# Altium PCB MezPCB.PcbDoc
Units mm, origin at the board's own origin, x right, y up, seen from the top; angles counter-clockwise.
Board outline 35 x 31.25 mm, 2 copper layers (Top Layer, Bottom Layer); 5 components, 18 nets, 80 pads, 0 vias.
Unrouted connection lines stored in the file: 5.
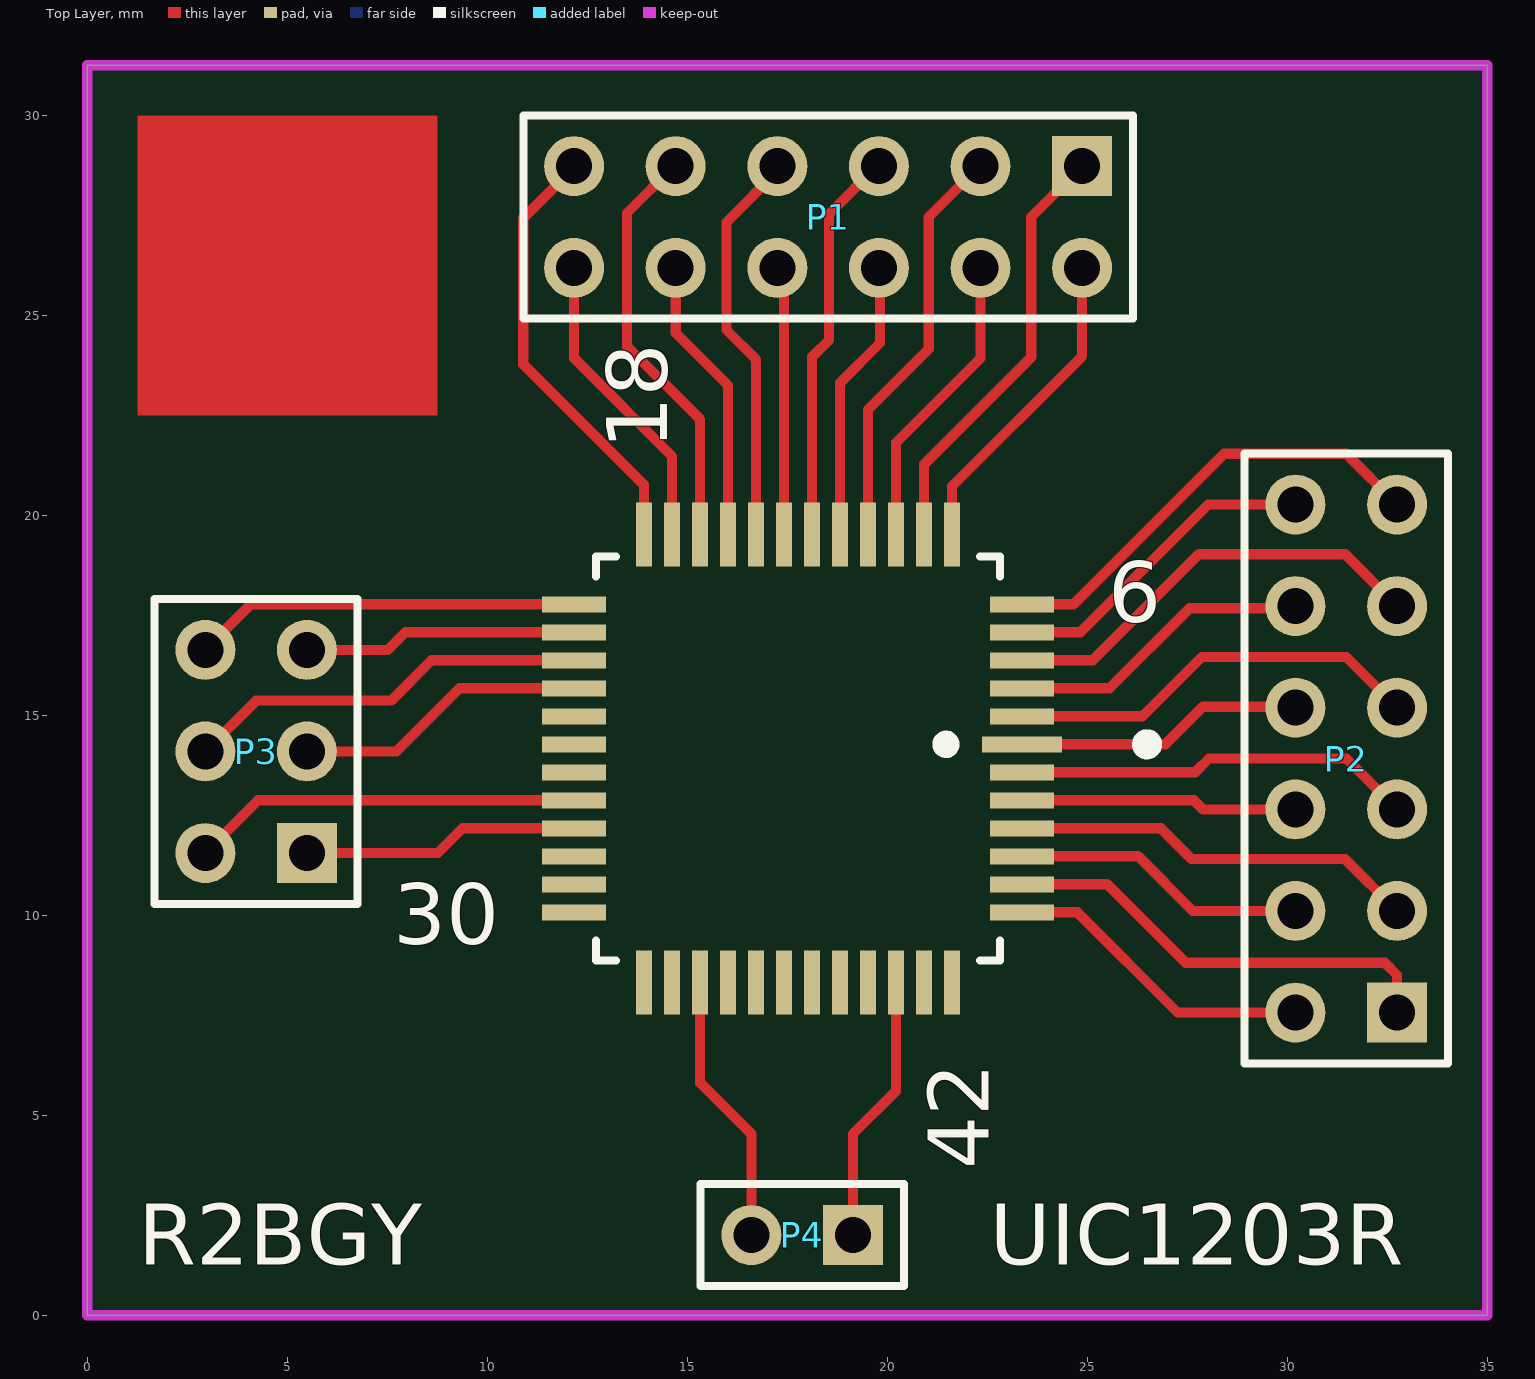
[diagram p0: Top Layer view]
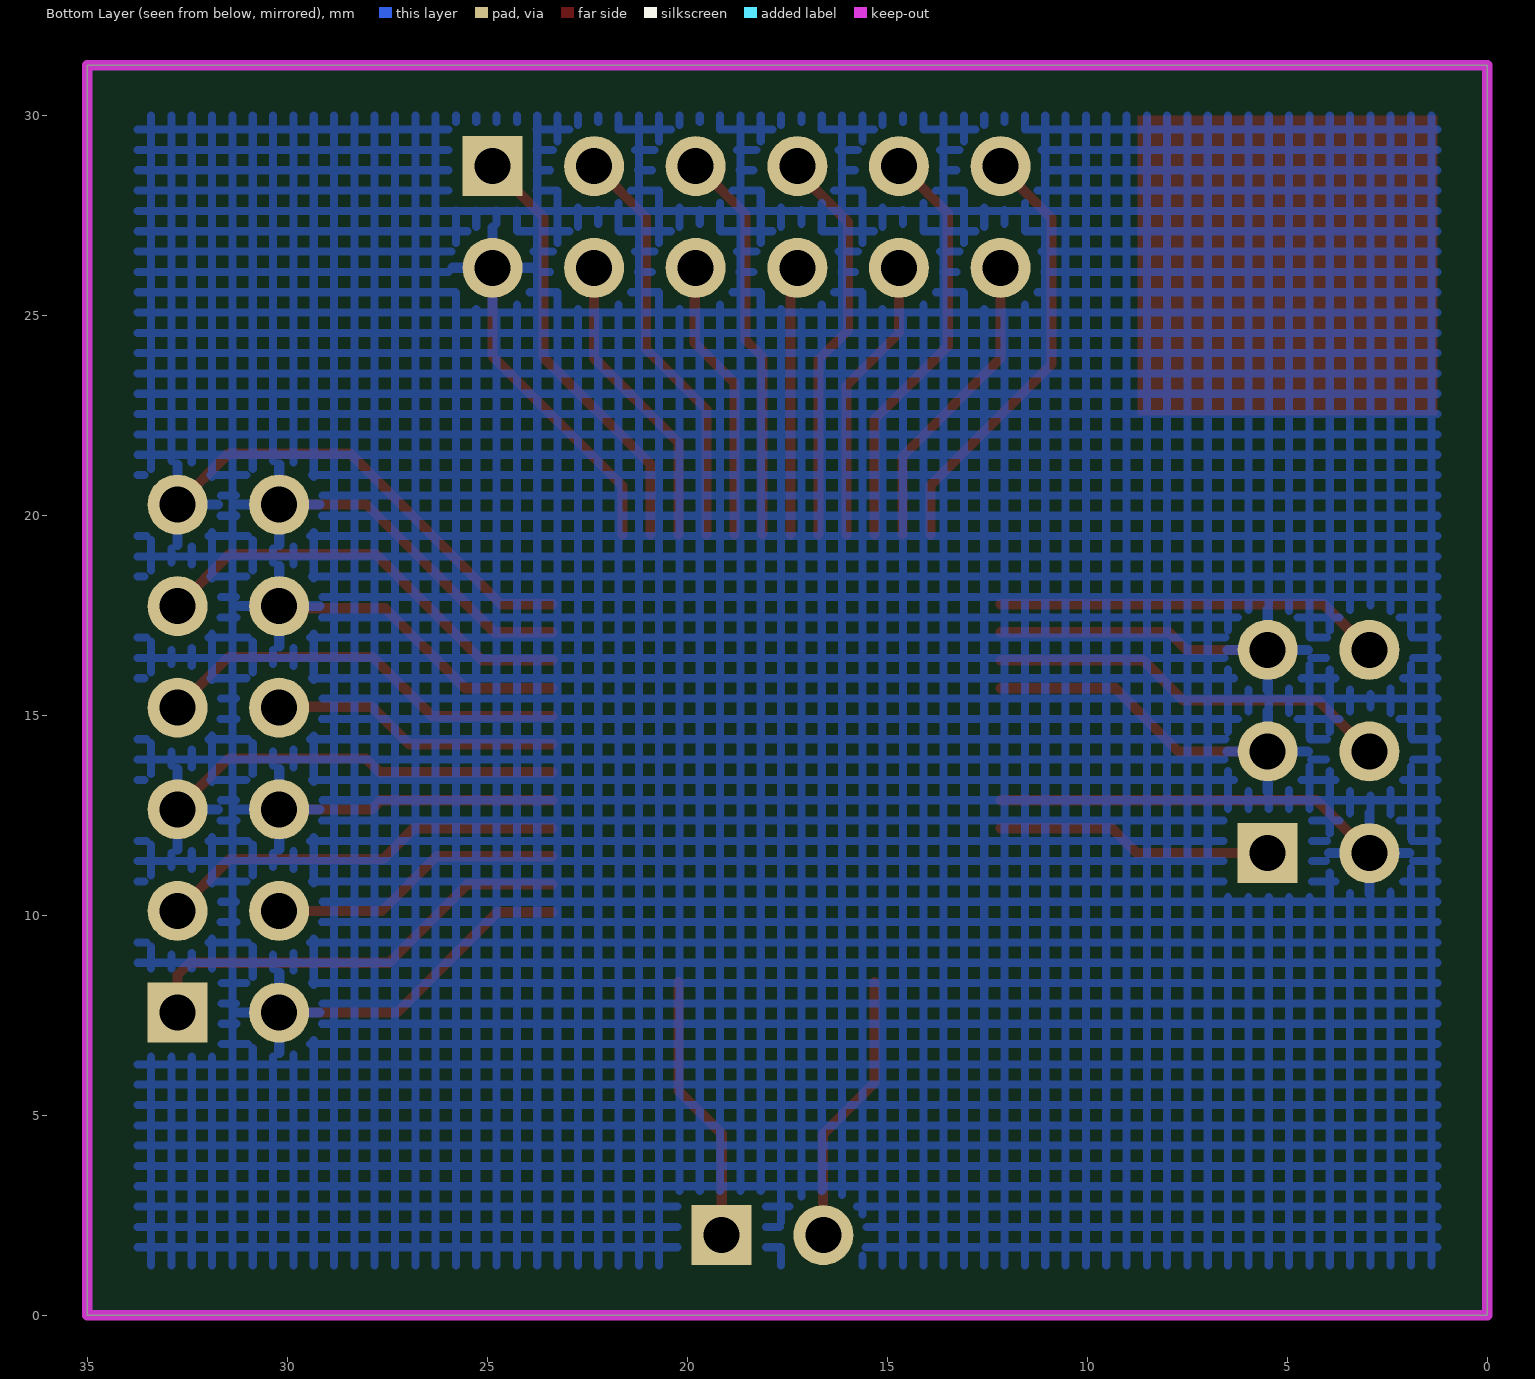
[diagram p1: Bottom Layer view, seen from below]

## Layer stack, top to bottom
Top Solder: solder mask 0.0102, Solder Resist, Dk 3.5
Top Layer: signal copper 0.0356
Dielectric 1: dielectric 0.32, FR-4, Dk 4.8
Bottom Layer: signal copper 0.0356
Bottom Solder: solder mask 0.0102, Solder Resist, Dk 3.5

## Board outline
0,0 35,0 35,31.25 0,31.25

## Design rules (kind name [scope] priority, off if disabled: settings)
Clearance [All] p1: gap=0.254
PolygonConnect [All] p1: connectstyle=Relief reliefconductorwidth=0.254 reliefentries=4 polygonreliefangle="90 Angle" airgapwidth=0.254
RoutingVias [All] p1: holewidth=0.711 width=1.27 viastyle="Through Hole" minholewidth=0.711 minwidth=1.27 maxholewidth=0.711 maxwidth=1.27
SolderMaskExpansion [All] p1: expansion=0.102
Width [All] p1: maxlimit=0.254 minlimit=0.254 preferedwidth=0.254
29 further rules are at their usual default settings.

## Components (designator, comment, footprint, x,y, rotation, side; value= is the part's Value field where it differs from the comment)
P1 "Header 6X2" HDR2X6 24.87,28.728 r180 top
P2 "Header 6X2" HDR2X6 32.744,7.569 r90 top
P3 "Header 3X2" HDR2X3 5.489,11.557 r90 top
P4 "Header 2" HDR1X2 19.141,2.007 r180 top
UIC1203R "UIC1203R" UIC1203R 23.371,14.275 r0 top (schematic designator D1)

## Footprints (in the part's own frame and the unit in brackets; to place one, negate y for a bottom-side part, rotate by r counter-clockwise, add the part's x,y. Pads: shape width x height; smd on the part's side, far side on the other; paste and mask are expansions set on the pad)
HDR1X2 [mm] "Connector; Header; 2 Position"
  rect 1.5x1.5 hole 0.9: 1(0,0)
  round 1.5 hole 0.9: 2(2.54,0)
  silkscreen extent -1.27,-1.27 3.81,1.27
HDR2X3 [mm] "Connector; Header; 3x2 Position"
  rect 1.5x1.5 hole 0.9: 1(0,0)
  round 1.5 hole 0.9: 2(0,2.54) 3(2.54,0) 4(2.54,2.54) 5(5.08,0) 6(5.08,2.54)
  silkscreen extent -1.27,-1.27 6.35,3.81
HDR2X6 [mm] "Connector; Header; 6x2 Position"
  rect 1.5x1.5 hole 0.9: 1(0,0)
  round 1.5 hole 0.9: 2(0,2.54) 3(2.54,0) 4(2.54,2.54) 5(5.08,0) 6(5.08,2.54) 7(7.62,0) 8(7.62,2.54) 9(10.16,0) 10(10.16,2.54) 11(12.7,0) 12(12.7,2.54)
  silkscreen extent -1.27,-1.27 13.97,3.81
UIC1203R [mm]
  rect 2x0.4 smd: 1(0,0)
  rect 1.6x0.4 smd: 2(0,0.7) 3(0,1.4) 4(0,2.1) 5(0,2.8) 6(0,3.5) 19(-11.2,3.5) 20(-11.2,2.8) 21(-11.2,2.1) 22(-11.2,1.4) 23(-11.2,0.7) 24(-11.2,0) 25(-11.2,-0.7) 26(-11.2,-1.4) 27(-11.2,-2.1) 28(-11.2,-2.8) 29(-11.2,-3.5) 30(-11.2,-4.2) 43(0,-4.2) 44(0,-3.5) 45(0,-2.8) 46(0,-2.1) 47(0,-1.4) 48(0,-0.7)
  rect 0.4x1.6 smd: 7(-1.75,5.25) 8(-2.45,5.25) 9(-3.15,5.25) 10(-3.85,5.25) 11(-4.55,5.25) 12(-5.25,5.25) 13(-5.95,5.25) 14(-6.65,5.25) 15(-7.35,5.25) 16(-8.05,5.25) 17(-8.75,5.25) 18(-9.45,5.25) 31(-9.45,-5.95) 32(-8.75,-5.95) 33(-8.05,-5.95) 34(-7.35,-5.95) 35(-6.65,-5.95) 36(-5.95,-5.95) 37(-5.25,-5.95) 38(-4.55,-5.95) 39(-3.85,-5.95) 40(-3.15,-5.95) 41(-2.45,-5.95) 42(-1.75,-5.95)
  silkscreen extent -10.65,-5.4 -0.55,4.7

## Part data
P1 P2: "Header, 6-Pin, Dual row"
P3: "Header, 3-Pin, Dual row"
P4: "Header, 2-Pin"

## Nets (pads, with @x,y where several pads share a name; then routed paths per layer and width w, separated by ;. In a path a pad name is that pad's centre, name@x,y a point inside that pad or via, vN(x,y) a via of type N, cw(c..) or ccw(c..) an arc to the next point about the centre after c; other vN are vias at no path point)
BE: P1.12 UIC1203R.17 | length 7.7
  Top Layer w0.254: P1.12 12.17,23.924 14.621,21.472 UIC1203R.17
CRDY: P4.2 UIC1203R.33 | length 6.8
  Top Layer w0.254: UIC1203R.33 15.321,5.812 16.608,4.525 P4.2@16.608,2.014
DVDD: P1.11 P4.1 UIC1203R.18 UIC1203R.40 | length 17.7
  Top Layer w0.254: P1.11@12.182,28.715 10.897,27.429 10.897,23.774 13.921,20.75 UIC1203R.18 ; P4.1 19.141,4.536 20.221,5.616 UIC1203R.40
ERUN: P1.5 UIC1203R.12 | length 9.9
  Top Layer w0.254: UIC1203R.12 18.121,23.96 18.545,24.384 18.545,27.534 P1.5@19.764,28.753
GND: P1.2 P2.2 P2.5 P2.6 P2.10 P2.11 P2.12 P3.2 P3.3 P3.5 UIC1203R.3 UIC1203R.5 UIC1203R.6 UIC1203R.7 UIC1203R.20 UIC1203R.22 UIC1203R.26 UIC1203R.43 UIC1203R.47 UIC1203R.48 | length 84.1
  Top Layer w0.254: P3.2 4.267,12.875 UIC1203R.26 ; P3.3 7.725,14.097 9.302,15.675 UIC1203R.22 ; P3.5 7.519,16.637 7.956,17.075 UIC1203R.20 ; UIC1203R.7 21.621,20.732 24.87,23.981 P1.2 ; UIC1203R.43 24.748,10.075 27.254,7.569 P2.2 ; UIC1203R.47 27.663,12.875 27.889,12.649 P2.6 ; UIC1203R.48 27.697,13.575 28.042,13.919 31.474,13.919 P2.5 ; UIC1203R.3 25.556,15.675 27.559,17.679 P2.10@30.204,17.679 ; UIC1203R.5 24.825,17.075 28.019,20.269 P2.12 ; UIC1203R.6 24.658,17.775 28.423,21.539 31.474,21.539 P2.11
MISO: P1.9 UIC1203R.16 | length 10.5
  Top Layer w0.254: P1.9@14.684,28.753 13.49,27.559 13.49,24.229 15.321,22.398 UIC1203R.16
MOSI: P1.10 UIC1203R.15 | length 7.2
  Top Layer w0.254: P1.10 14.71,24.559 16.021,23.247 UIC1203R.15
NRST: P1.4 UIC1203R.9 | length 7.5
  Top Layer w0.254: UIC1203R.9 20.221,21.821 22.33,23.93 P1.4
SCLK: P1.7 UIC1203R.14 | length 10
  Top Layer w0.254: UIC1203R.14 16.721,23.894 15.98,24.635 15.98,27.331 P1.7@17.313,28.664
SCS: P1.8 UIC1203R.13 | length 6.7
  Top Layer w0.254: UIC1203R.13 P1.8@17.421,26.188
SEU: P1.6 UIC1203R.11 | length 7.1
  Top Layer w0.254: UIC1203R.11 18.821,23.314 19.815,24.308 P1.6@19.815,26.188
VCC: P2.7 UIC1203R.2 | length 10.5
  Top Layer w0.254: UIC1203R.2 26.38,14.975 27.864,16.459 31.474,16.459 P2.7
VDA: P2.4 P2.9 UIC1203R.4 UIC1203R.45 | length 18.4
  Top Layer w0.254: UIC1203R.45 26.269,11.475 27.635,10.109 P2.4 ; UIC1203R.4 25.138,16.375 27.788,19.025 31.448,19.025 P2.9
VDD: P1.1 P3.1 P3.6 UIC1203R.8 UIC1203R.19 UIC1203R.27 | length 27.5
  Top Layer w0.254: P3.6 4.087,17.775 UIC1203R.19 ; P3.1 8.763,11.557 9.381,12.175 UIC1203R.27 ; UIC1203R.8 20.921,21.277 23.6,23.955 23.6,27.458 P1.1
VDDA: P2.3 UIC1203R.46 | length 10.2
  Top Layer w0.254: UIC1203R.46 26.839,12.175 27.61,11.405 31.448,11.405 P2.3
VDPIX: P2.1 P2.8 UIC1203R.1 UIC1203R.44 | length 18.5
  Top Layer w0.254: UIC1203R.44 25.496,10.775 27.457,8.814 32.436,8.814 32.744,8.506 P2.1 ; UIC1203R.1 26.95,14.275 27.889,15.215 P2.8@30.204,15.215
VE: P3.4 UIC1203R.21 | length 10.2
  Top Layer w0.254: P3.4 4.219,15.367 7.598,15.367 8.605,16.375 UIC1203R.21
XI: P1.3 UIC1203R.10 | length 10.4
  Top Layer w0.254: UIC1203R.10 19.521,22.645 21.034,24.158 21.034,27.458 P1.3@22.317,28.74
pads on no net: UIC1203R.23 UIC1203R.24 UIC1203R.25 UIC1203R.28 UIC1203R.29 UIC1203R.30 UIC1203R.31 UIC1203R.32 UIC1203R.34 UIC1203R.35 UIC1203R.36 UIC1203R.37 UIC1203R.38 UIC1203R.39 UIC1203R.41 UIC1203R.42

## Polygon pours and split planes (outlines as drawn)
GND on Bottom Layer "Top Overlay-No Net" (hatched 90Degree grid 0.508 track 0.203, remove dead copper, pour order 2): 1.25,30 33.75,30 33.75,1.25 1.25,1.25

## Keep-outs
Keep-Out Layer:
  the board outline again, w0.254

## Other copper
Top Layer:
  rectangle: 1.25,22.5 8.75,30

## Silkscreen, mask and mechanical layers (free items; w line width, h text height)
Top Overlay:
  circle w0.254: c26.492,14.275 r0.25
  circle w0.254: c26.5,14.25 r0.053
  text "18" at 14.503,21.641 h1.52 r90
  text "6" at 25.527,17.323 h1.52
  text "30" at 7.645,9.271 h1.52
  text "42" at 22.53,3.658 h1.52 r90
  text "R2BGY" at 1.27,1.27 h1.52